# Altium PCB Apollo_ES_Board-V1.1 1.PcbDoc (part 2 of 3)
Units mil, origin at the board's own origin, x right, y up, seen from the top; angles counter-clockwise.
Board outline 984.25 x 614.17 mil, 4 copper layers (Top, Inner Layer 2, Inner Layer 3, Bottom), stack 4.71 mil thick; 86 components, 58 nets, 348 pads, 1209 vias.
Unrouted connection lines stored in the file: 448.
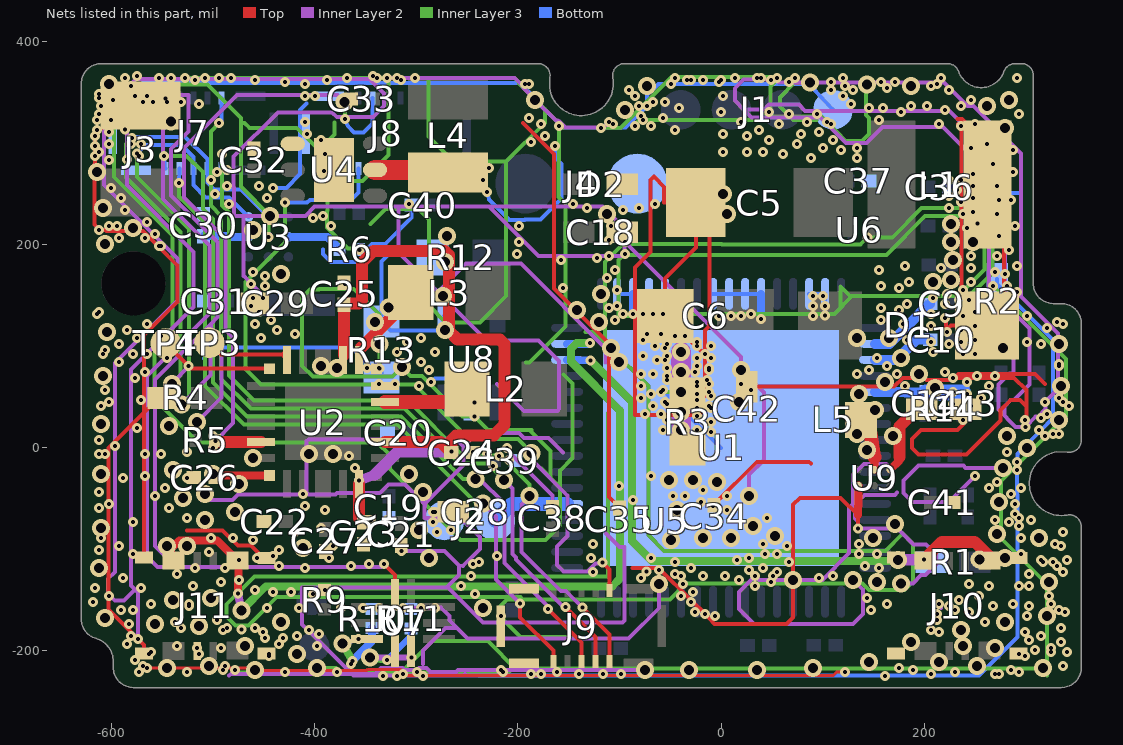
[diagram p4: the nets of this part, all layers, seen from the top]

## Via types
v1: diameter 9.84, hole 3.94, Top to Inner Layer 2, 528 vias
v2: diameter 9.84, hole 3.94, Inner Layer 3 to Bottom, 478 vias
v3: diameter 17.72, hole 9.84, Inner Layer 2 to Inner Layer 3, 198 vias
v4: diameter 17.72, hole 9.84, Top to Bottom, 5 vias

## Nets (pads, with @x,y where several pads share a name; then routed paths per layer and width w, separated by ;. In a path a pad name is that pad's centre, name@x,y a point inside that pad or via, vN(x,y) a via of type N, cw(c..) or ccw(c..) an arc to the next point about the centre after c; other vN are vias at no path point) (continued)
GND: C18.2 C19.1 C20.2 C21.1 C22.2 C23.2 C24.2 C25.1 C26.2 C27.2 C28.2 C29.1 C30.2 C31.2 C32.2 C33.2 C34.2 C35.1 C36.2 C37.1 C38.2 C39.2 C40.2 C41.2 C42.1 D2.2 J1.1 J2.1 J3.2 J4.2 J7.11 J7.12 J7.15 J8.11 J8.12 J8.15 J9.11 J9.12 J9.15 J10.0 J10.0/2 J10.0/3 J10.0/4 J11.0 J11.0/2 J11.0/3 J11.0/4 J11.3 R1.2 R2.2 R3.2 R4.2 R6.2 R9.1 R10.2 R11.2 R13.1 R14.1 U2.23 U2.24 U3.B2 U4.1 U4.7 U5.B1 U6.B1 U7.6 U8.2 U9.A1 | length 23287.8
  Top w2.95: v1(-564.96,-216.54) -463.92,-216.54 -461.46,-219 v1@-429.13,-219 ; v1(-429.13,-220.47) v1@-429.13,-219 ; v1(-377.95,-220.47) v1@-377.95,-219 ; v1(-293.31,-224.41) v1@-293.31,-224.08 ; v1(122.05,-220.47) 114.03,-220.47 110.43,-224.08 v1@-293.31,-224.08 ; v1@-429.13,-219 v1@-377.95,-219 ; v1@-377.95,-219 -348.81,-219 -347.82,-218.01 -315.42,-218.01 -309.35,-224.08 v1@-293.31,-224.08
  Top w3.94: J3.2@-571.52,336.63 -587.27,336.63 -616.79,307.11 v1(-616.14,297.24) v1(-616.14,287.4) -616.14,279.24 -616.79,278.59 -616.79,219.72 v1(-612.2,214.57) -606.18,214.57 -604.92,213.31 -569.12,213.31 v1@-553.89,198.08 ; J11.0/4@-568.01,-202.62 -568.01,-194.25 v1(-573.91,-188.35) -603.21,-159.05 -603.21,-0.15 -554.03,49.02 R4.2@-549.11,49.02 ; J11.0/3@-568.01,-108.05 -568.01,110.99 -535.35,143.65 -535.35,179.54 v1@-553.89,198.08 ; v1(-553.15,198.82) v1@-553.89,198.08 ; -525.74,-81.39 -490.61,-81.39 -475.78,-96.22 -462.58,-96.22 -450.49,-108.3 J11.0/2@-447.54,-108.3 ; -195.17,319.51 -164.72,289.06 -164.72,156.73 -110.52,102.54 -110.52,-48.27 C35.1@-100.28,-58.52 ; J9.12@-194.11,-212 -192.06,-212 J9.12@-190.7,-213.36 ; C38.2@-166.16,-58.48 v1(-166.16,-57.39) ; -87.36,-118.16 v1@-61.65,-118.16 ; v1(-61.02,-120.08) v1@-61.65,-118.16 ; v1(-29.53,-151.57) v1@-28.88,-150.93 ; C34.2@-6.96,-56.64 -6.96,-55.76 35.02,-13.78 86.64,-13.78 88.58,-15.73 ; C42.1@25.34,60.08 170.32,60.08 179.13,68.9 199.95,68.9 201.92,66.93 227.72,66.93 233.62,72.83 309.06,72.83 318.9,62.99 ; v1(134.56,-79.34) 134.56,-66.34 117.46,-49.24 77.42,-49.24 70.86,-55.8 70.86,-166.88 64.34,-173.38 -6.43,-173.38 v1(-15.75,-163.39) v1@-28.88,-150.93 ; v1(228.35,68.9) 288.24,68.76 300.33,56.67 300.33,40.75 ; R14.1@240.48,37.98 240.48,25.39 232.4,17.3 196.54,17.3 188.03,8.79 188.03,-0.17 194.38,-6.52 241.65,-6.52 275.14,26.97 275.14,37.22 285.02,47.1 ; 284.7,47.1 285.02,47.1 ; v1(299.46,20.61) v1@299.46,23.14 ; C35.1@-100.28,-58.52 v1(-98.43,-59.06) C35.1@-100.28,-59.39 C35.1@-100.28,-58.52 ; v1@-61.65,-118.16 v1@-28.88,-150.93 ; 285.02,47.1 293.98,47.1 300.33,40.75 ; 298.61,30.06 299.46,29.21 ; 298.61,30.06 300.33,30.08 ; 298.61,30.06 300.33,31.79 ; 298.61,30.06 295.57,27.03 v1@299.46,23.14 ; v1@299.46,23.14 299.46,29.21 ; 299.46,29.21 300.33,30.08 ; 300.33,30.08 300.33,31.79 ; 300.33,31.79 300.33,40.75
  Top w7.87: 134.56,-66.34 134.56,-57.85 134.92,-57.49 U9.A1@134.92,-37.29
  Inner Layer 2 w3.94: v1(-586.81,313.04) v1@-585.02,313.04 ; v1(-573.91,-188.35) -573.91,-142.7 -577.03,-139.58 ; v1(-568.9,340.55) v1@-568.62,340.27 ; -544.6,-109.33 -557.14,-96.79 -557.14,67.24 -502.33,122.05 ; v3(-515.75,25.59) -491.62,49.72 -491.62,107.35 -502.33,118.06 -502.33,122.05 ; v3(-507.87,-45.28) -511.59,-51.58 -481.08,-51.58 -475.57,-46.07 -405.9,-46.07 ; -484.25,-224.21 -482.48,-222.44 -340.55,-222.44 -334.65,-216.54 -313.81,-216.54 -311.84,-218.5 -299.23,-218.5 -297.27,-216.54 -289.84,-216.54 -285.9,-220.47 -260.86,-220.47 -258.89,-218.5 v3(-74.8,-218.5) ; v1(-450.79,147.64) -449.54,148.88 v1(-462.6,161.42) -469.92,169.26 -469.92,228.27 ; v1(-405.51,-179.13) v1@-406.29,-179.92 ; v1(-342.52,366.14) v1@-345.98,362.81 ; v1(-332.68,-224.41) v1@-332.68,-224.21 ; -332.59,-157.24 -276,-157.24 -267.51,-165.72 -267.51,-169.9 -259.84,-177.57 ; v1(-328.74,364.17) v1(-318.9,364.17) -262.65,364.17 -203.44,364.18 v1@-194.77,355.51 ; v1(-318.9,-224.41) v1@-318.9,-224.21 ; v1(-314.65,-101.75) -272.25,-101.75 -257.96,-116.04 ; v1(-293.31,-224.41) v1@-293.31,-224.21 ; -293.31,-212.6 -293.31,-199.57 -271.31,-177.57 -259.84,-177.57 ; -251.97,-222.44 -251.97,-224.21 ; -220.53,62.72 -194.22,36.41 -161.12,36.41 -159.45,38.08 -159.45,85.31 -179.83,105.69 -231.09,105.69 v3@-274.31,148.91 ; v1(-210.63,0) -211.82,-1.19 -166.16,-46.86 v1(-166.16,-57.39) ; -199.11,14.61 -240.15,14.61 -253.39,1.37 ; -199.1,14.61 -193.97,9.48 -169.79,9.48 -155.87,-4.44 ; v1(-192.91,358.27) v1@-194.77,355.51 ; v2(-187.01,-222.44) v1@-187.01,-224.21 ; v1(-177.17,-222.44) -176.73,-224.21 v1@-187.01,-224.21 ; v1(-122.05,187.01) v1@-122.05,188.56 ; -113.67,-83.73 -99.85,-97.55 -95.22,-97.55 -95.22,-169.89 -97.28,-171.94 -234.64,-171.94 -269.02,-137.56 -270.52,-137.56 ; -113.67,84.07 -113.67,97.77 -197.09,181.19 -251.13,181.19 v3@-278.86,153.46 ; v1(-110.24,320.87) -115.96,315.14 -153.28,315.14 -158.82,320.68 -159.03,320.68 -159.3,320.96 -159.46,320.96 -159.69,321.18 -159.87,321.18 -160.15,321.46 -160.48,321.46 -161.02,321.99 -162.55,321.99 v3(-183.07,342.52) -194.77,354.22 v1@-194.77,355.51 ; v1(-98.43,212.6) v1@-95.22,215.86 ; v3(-61.02,-133.86) -61.02,-157.96 -90.99,-187.93 -249.48,-187.93 -259.84,-177.57 ; v3(27.56,-47.24) 27.56,-26.32 41.96,-11.93 41.96,54.5 v3(19.69,76.77) 19.69,89.48 -34.52,143.68 -35.41,143.68 v1(-94.49,202.76) v1@-95.22,202.76 ; v1(35.43,364.17) v1@35.43,362.5 ; v1(66.93,360.24) v1@66.93,359.29 ; v1(108.27,360.24) v1@108.27,359.29 ; v3(129.92,-129.92) 139.75,-139.75 139.75,-163.46 129.98,-173.23 32.41,-173.23 17.72,-158.54 17.72,-141.73 31.5,-127.95 35.33,-127.95 37.3,-129.92 99.72,-129.92 125.98,-103.66 125.98,-59.06 129.92,-55.12 129.92,-26.37 140.54,-15.75 162.41,-15.75 163,-16.34 ; v3(143.37,357.42) v3@143.37,359.29 ; v1(157.48,360.24) v1@157.48,359.29 ; v1(171.26,360.24) v1@171.26,359.29 ; 173.29,-44.11 170.9,-46.5 141.31,-46.5 131.86,-55.95 131.86,-69.75 134.56,-72.45 v1(134.56,-79.34) 173.45,-79.34 189.28,-95.17 201.73,-95.17 208.07,-101.52 ; v3(177.16,-133.59) 188.67,-133.59 196.87,-125.39 200.96,-125.39 211.56,-114.79 ; v3(186.88,356.26) 186.88,358.52 v3@187.65,359.29 ; v1(224.41,352.36) v1@225.44,353.4 ; v1(250,-27.56) 224.31,-53.25 188.18,-53.25 179.53,-44.6 179.53,-32.36 194.25,-17.64 238.31,-17.64 240.35,-19.69 v3(277.56,-19.69) ; 278.67,31.79 278.67,40.75 285.02,47.1 288.24,47.1 303.62,62.48 303.62,117.28 279.26,141.64 279.26,277.31 224.93,331.64 82.55,331.63 76.4,337.78 47.18,337.78 42.36,332.96 22.07,332.96 ; v1(314.96,29.53) v1@312.17,30.77 ; v1@-585.02,313.04 -585.02,323.88 v1@-568.62,340.27 ; v1@-585.02,313.04 v1(-584.95,283.78) -585.02,258.46 -519.15,192.58 -519.15,138.64 -580.96,76.82 -580.96,-135.65 -577.03,-139.58 ; -577.03,-139.58 -587.82,-150.37 -596.86,-150.37 -603.35,-143.88 -603.35,-128.89 -596.77,-122.31 -596.77,83.28 -534.89,145.16 -534.89,186.06 -607.41,258.58 -607.41,331.42 -576.03,362.81 v1@-345.98,362.81 ; v1@-568.62,340.27 -561.85,347.05 -524.33,347.05 -524.33,311.35 -541.49,294.19 -541.49,248.33 -495.52,202.37 -495.52,128.85 -502.33,122.05 ; -469.92,228.27 -479.32,228.27 -479.77,286.46 -436.32,329.91 -382.88,329.91 -378.29,325.32 -342.71,325.32 -331.72,336.31 -331.72,348.55 v1@-345.98,362.81 ; -469.92,228.27 v3(-444.05,228.27) -409.13,228.27 -400.06,237.34 -317.44,237.34 ; v1@-406.29,-179.92 -412.41,-173.8 -412.41,-137.56 -270.52,-137.56 ; v1@-406.29,-179.92 -362,-224.21 v1@-332.68,-224.21 ; -405.9,-46.07 -379.84,-46.07 -378.34,-44.57 -335.94,-44.57 -327.39,-36.02 -311.12,-36.02 -291.78,-55.36 ; -405.9,-46.07 -408,-43.97 -408,6.49 -406.19,8.3 -260.32,8.3 -253.39,1.37 ; v1@-332.68,-224.21 v1@-318.9,-224.21 ; v1@-318.9,-224.21 v1@-293.31,-224.21 ; -317.44,237.34 -317.44,192.04 v3@-278.86,153.46 ; -317.44,237.34 -228.48,237.34 ; v1@-293.31,-224.21 -251.97,-224.21 ; -291.78,-57.09 -291.34,-57.09 -291.78,-55.36 ; -291.78,-57.09 -291.78,-55.36 ; -291.78,-57.09 -291.78,-69.17 -256.44,-69.17 -237.6,-88.01 -237.6,-99.43 -253.94,-116.14 -257.96,-116.04 ; -291.78,-55.36 -253.39,-16.97 -253.39,1.37 ; v3@-278.86,153.46 v3(-273.62,149.61) v3@-274.31,148.91 ; v3@-278.86,153.46 v3@-274.31,148.91 ; -270.52,-137.56 -257.96,-125 -257.96,-116.04 ; -251.97,-224.21 v1@-187.01,-224.21 ; -228.48,237.34 -179.7,188.56 v1@-122.05,188.56 ; -228.48,237.34 v3@-116.71,237.34 ; v1@-122.05,188.56 v1(-110.24,188.98) v1@-97.75,188.56 ; v3@-116.71,237.34 v3@-110.94,231.58 ; v3@-116.71,237.34 v3(-112.2,230.31) v3@-110.94,231.58 ; v3@-110.94,231.58 v1@-95.22,215.86 ; v1@-97.75,188.56 v1@-95.22,191.09 ; v1@-97.75,188.56 v1(-94.49,190.94) v1@-95.22,191.09 ; v1@-95.22,191.09 v1@-95.22,202.76 ; v1@-95.22,202.76 v1@-95.22,215.86 ; 22.07,332.96 30,325.03 97.68,325.03 122.65,300.06 143.12,300.06 158.93,315.87 218.42,315.87 263.51,270.79 263.51,135.12 287.87,110.75 287.87,73.18 283.7,73.18 272.93,62.41 272.93,37.53 289.85,20.61 v1(299.46,20.61) 309.62,30.77 v1@312.17,30.77 ; 22.07,332.96 13.42,341.61 13.42,353.85 22.07,362.5 v1@35.43,362.5 ; v1@35.43,362.5 v1(49.21,362.2) 53.77,362.5 56.98,359.29 v1@66.93,359.29 ; v1@66.93,359.29 v3(87.28,359.29) v1@108.27,359.29 ; v1@108.27,359.29 v3@143.37,359.29 ; v3@143.37,359.29 v1@157.48,359.29 ; v1@157.48,359.29 v1@171.26,359.29 ; v1@171.26,359.29 v3@187.65,359.29 ; v3@187.65,359.29 219.55,359.29 v1@225.44,353.4 ; 208.07,-101.52 211.89,-105.34 211.89,-114.46 211.56,-114.79 ; 208.07,-101.52 211.56,-105.01 211.56,-114.79 ; v1@225.44,353.4 242.6,336.24 248.24,336.24 295,289.48 295,148.88 331.38,112.51 331.38,57.76 v1(318.9,45.28) 319.37,37.97 v1@312.17,30.77 ; v1(214.57,-153.54) 216.45,-153.54 216.45,-157.49 v1(214.57,-153.54)
  Inner Layer 3 w3.94: v2(-517.72,362.2) v2@-517.72,364.18 ; -473.37,-221.32 -374.46,-221.32 ; v2(-445.57,207.51) -445.57,226.75 v3(-444.05,228.27) -472.71,256.93 -472.71,319.54 ; v3(-397.64,-216.54) -379.24,-216.54 -374.46,-221.32 ; v2(-389.76,289.37) v2@-393.48,290.44 ; -380.76,320.35 -380.76,308.41 -393.48,295.69 v2@-393.48,290.44 ; -365.13,262.49 -353.1,262.49 -327.6,287.99 -327.6,362.85 -326.27,364.18 ; v2(-355.84,194.44) v2@-355.84,196.09 ; -345.31,220.2 -330.47,235.04 -298.09,235.04 -287.6,224.55 -287.6,193.77 ; v3(-340.55,124.02) v3@-336.5,131.1 ; v2(-336.5,77.95) v3(-336.5,102.12) v3@-336.5,131.1 ; v3(-271.65,116.14) v3@-271.16,123.52 ; v2(-265.75,-80.71) v2@-266.03,-81 ; -192.05,84 -188.7,84 -153.43,119.26 -153.43,240.29 -160.11,246.97 v2(-159.45,316.93) ; -186.44,17.46 -188.55,17.46 ; v2(-177.17,318.9) v2@-173.63,319.79 ; -176.93,-20.55 -167.87,-29.61 ; -155.04,72.15 -146.36,63.47 -146.36,-10.11 -158.86,-22.61 -158.86,-38.62 ; -148.27,-186.4 -197.43,-186.4 -217.82,-166.01 -217.82,-156.23 -210.89,-149.3 -195.25,-149.3 ; -133.73,113.77 -124.77,113.77 -116.02,105.03 ; v2@-114.17,-218.5 -114.17,-217.23 ; -111.3,34.25 -111.3,-126.5 -459.23,-126.5 -486.76,-154.03 -486.76,-166.27 -478.11,-174.92 -465.41,-174.92 -437.62,-147.13 -197.42,-147.13 -195.25,-149.3 ; v3(-108.27,98.43) v3@-108.85,97.85 ; v2(-84.65,316.93) -85.29,317.58 v2@-80.24,322.63 ; v2(-78.74,326.77) v2@-80.24,322.63 ; v2(-45.28,364.17) v2@-45.28,364.78 ; v3(-31.5,-218.5) v3@-31.5,-217.23 ; v2(13.78,364.17) v2@13.78,364.78 ; v3(35.43,-218.5) v3@35.43,-217.23 ; v2(39.37,364.17) v2@39.37,364.78 ; v3(87.28,359.29) 72.2,359.29 57.76,344.85 57.76,335.89 71.02,322.63 93.82,322.63 ; v3(90.55,-216.54) v3@90.55,-217.23 ; v3(143.37,357.42) 142.37,356.42 142.37,327.41 145.3,324.48 145.3,308.71 138.59,302 122.61,302 113.94,310.68 110.53,314.37 v2(104.33,320.87) 98.74,326.16 42.47,326.16 ; v3(177.16,-133.59) v3@180.49,-140.12 ; 239.69,144.85 v2@266.92,172.09 ; v2(267.72,159.45) 339.53,87.45 v3@339.53,31.32 ; v2(269.69,173.23) v2@266.92,172.09 ; v3(271.65,-84.65) v3@275.26,-89.07 ; v2(271.65,-33.46) v2@275.26,-32.95 ; v3(273.62,-53.15) v3@275.26,-53.15 ; v2(285.43,-218.5) v2@285.43,-217.23 ; v3(320.87,-165.35) v3@320.52,-165.35 ; v3(322.83,-131.89) v3@320.52,-134.33 ; v3(332.68,27.56) v3@339.53,31.32 ; -529,357.38 -522.2,364.18 v2@-517.72,364.18 ; -529,357.38 -570,357.38 -597.41,329.97 -597.41,266.62 -539.81,209.03 -539.81,110.72 -557.52,93.01 -557.52,47.92 -515,5.4 -338.58,5.4 -325.97,-7.21 -325.97,-21.06 v2(-283.46,-62.99) v2@-266.03,-81 ; -529,357.38 -505.51,357.38 -472.71,324.57 -472.71,319.54 ; v2@-517.72,364.18 v2(-507.87,364.17) v2(-494.09,364.17) v2(-482.28,364.17) v2(-368.11,364.17) v2(-338.58,364.17) -326.27,364.18 ; -472.71,319.54 -469.01,319.54 -464.44,314.97 -418.01,314.97 v2@-393.48,290.44 ; v2@-393.48,290.44 -387.29,284.25 -387.29,233.39 -387.98,232.7 -387.98,216.68 -367.39,196.09 v2@-355.84,196.09 ; -374.46,-221.32 v2@-315.15,-221.32 ; v2@-355.84,196.09 -289.92,196.09 -287.6,193.77 ; v3@-336.5,131.1 -361.9,156.5 -395.15,156.5 -396.05,155.6 -404.75,155.6 -412.4,147.95 -412.4,80.61 -401.91,70.13 -323.54,70.13 v3(-314.37,79.3) -305.93,70.86 -294.47,70.86 -254.45,30.84 v2(-242.91,30.84) -229.53,17.46 -188.55,17.46 ; -326.27,364.18 v2(-301.18,364.17) -288,364.18 ; v2@-315.15,-221.32 -284.25,-190.42 -229.37,-190.42 -201.29,-218.5 v3(-74.8,-218.5) v3@-74.8,-217.23 ; v2@-315.15,-221.32 -209.55,-221.32 -205.46,-217.23 -114.17,-217.23 ; -288,364.18 -288,306.39 -263.41,281.8 -211.62,281.8 ; -288,364.18 -203.44,364.18 -198.81,359.55 -198.81,358.38 v3(-183.07,342.52) -173.63,333.2 ; -287.6,193.77 -287.6,139.96 v3@-271.16,123.52 ; v3@-271.16,123.52 -237.41,123.52 -211.62,149.31 -211.62,281.8 ; v2@-266.03,-81 -256.39,-90.64 -172.76,-90.64 -158.86,-76.74 -158.86,-38.62 ; -211.62,281.8 v2@-173.63,319.79 ; -195.25,-149.3 -50.55,-149.31 -34.98,-133.74 139.2,-133.74 145.58,-140.12 v3@180.49,-140.12 ; -188.55,17.46 -167.87,-3.22 -167.87,-29.61 ; v2@-173.63,319.79 -173.63,333.2 ; -173.63,333.2 v2@-160.11,319.68 ; -167.87,-29.61 -158.86,-38.62 ; v2@-160.11,319.68 v2(-159.45,316.93) ; v2@-160.11,319.68 v2@-155.58,315.15 ; v2(-159.45,316.93) v2@-155.58,315.15 ; v2@-155.58,315.15 v2(-118.11,314.96) -98.57,315.15 -48.94,364.78 v2@-45.28,364.78 ; -116.02,105.03 -114.41,106.64 -114.41,182.82 -96.79,200.44 -8.1,200.44 ; -116.02,105.03 v3@-108.85,97.85 ; -114.17,-217.23 v3@-74.8,-217.23 ; v3@-108.85,97.85 -71.66,60.66 -71.66,-86.09 -56.17,-101.58 161.74,-101.57 178.71,-84.6 188.97,-94.86 188.97,-131.64 v3@180.49,-140.12 ; v2@-80.24,322.63 38.94,322.63 42.47,326.16 ; v3@-74.8,-217.23 v3@-31.5,-217.23 ; v2@-45.28,364.78 v2@13.78,364.78 ; v3@-31.5,-217.23 v3@35.43,-217.23 ; -8.1,200.44 0.32,200.44 0.83,199.93 ; -8.1,200.44 0.83,199.93 ; 0.83,199.93 136.89,199.93 v2(143.93,206.97) 168.49,206.97 197.34,235.82 259.24,235.82 266.92,228.13 v2@266.92,172.09 ; v2@13.78,364.78 v2@39.37,364.78 ; v3@35.43,-217.23 v3@90.55,-217.23 ; v2@39.37,364.78 v2@55.12,364.78 ; 42.47,326.16 48.47,332.16 48.47,355.46 v2@57.79,364.78 ; v2@55.12,364.78 v2(55.12,364.17) v2@57.79,364.78 ; v2@55.12,364.78 v2@57.79,364.78 ; v3@90.55,-217.23 v2@285.43,-217.23 ; v3@275.26,-89.07 v3@320.52,-134.33 ; v3@275.26,-89.07 v3@275.26,-53.15 ; v3@275.26,-53.15 v2@275.26,-32.95 ; v2@275.26,-32.95 v3@339.53,31.32 ; v2@285.43,-217.23 v3@313.54,-217.23 ; v3@313.54,-217.23 v3(316.93,-216.54) v3@320.52,-216.54 ; v3@313.54,-217.23 320.52,-224.21 v3@320.52,-216.54 ; v3@320.52,-216.54 v3@320.52,-165.35 ; v3@320.52,-165.35 v3@320.52,-134.33
  Bottom w3.94: v2(-576.77,346.46) J7.12@-576.05,346.14 -576.05,352.83 -569.62,359.26 v2@-429.13,359.26 ; -509.18,87.93 -498.29,98.82 -363.94,98.82 R13.1@-334.19,69.07 -334.19,75.64 v2(-336.5,77.95) ; v2(-440.94,255.91) -427.84,255.91 -414.38,269.37 -414.38,332.46 -408.11,338.73 ; v2(-429.13,360.24) v2@-429.13,359.26 ; v2(-409.45,358.27) v2@-409.45,359.26 ; -391.81,195.36 -391.81,190.7 -384.1,182.99 -354.48,182.99 -352.36,185.11 ; v2(-355.84,194.44) R6.2@-356.68,195.28 ; -352.36,145.82 -352.36,185.11 ; C40.2@-304.63,238.94 -304.63,226.62 -330.46,200.79 -343.81,200.79 -348.17,196.43 ; -284.3,65.52 -281.82,68 -259.7,68 -245.92,54.21 U8.2@-245.92,44.37 ; v2(-242.91,30.84) -242.91,41.37 U8.2@-245.92,44.37 ; v2(-242.56,44.79) U8.2@-245.92,44.37 ; -238.26,-224.21 253.7,-224.21 291.49,-186.42 v2@291.49,-76.77 ; v2(-230.31,251.97) -230.98,251.72 -228.35,244.61 -228.35,244.2 -208.56,224.41 -193.37,224.41 -193.22,224.56 -178.03,224.56 -157.28,245.32 -157.28,279.46 -163.39,285.57 v2(-163.39,297.24) ; v2(-159.45,316.93) v2@-158.4,317.97 ; J1.1@110.13,332.7 91.01,353.21 86.1,358.12 -61.69,358.12 -72.83,346.98 v2(-72.83,336.61) -94.39,315.15 v2(-118.11,314.96) -155.58,315.15 v2@-158.4,317.97 ; C36.2@225.23,256.51 238.53,256.89 254.92,256.89 260.83,250.98 292.89,250.98 ; R2.2@271.71,166.27 271.71,161.35 v2@302.16,130.9 ; v2(293.31,-76.77) v2@291.49,-76.77 ; v2(301.18,129.92) v2@302.16,130.9 ; v2(312.99,17.72) v2@314.06,16.65 ; v2@-429.13,359.26 v2@-409.45,359.26 ; v2@-409.45,359.26 -198.33,359.26 -183.24,344.17 -183.24,342.81 v2@-158.4,317.97 ; R6.2@-356.68,195.28 -348.74,195.28 ; R6.2@-356.68,195.28 R6.2@-352.36,192.24 ; -352.36,185.11 R6.2@-352.36,192.24 ; R6.2@-352.36,192.24 -349.03,195.57 ; -349.03,195.57 -348.17,196.43 ; -349.03,195.57 -348.17,195.85 ; -349.03,195.57 -348.74,195.28 ; -348.74,195.28 -348.17,196.43 ; -348.74,195.28 -348.17,195.85 ; -348.17,195.85 -348.17,196.43 ; v2@291.49,-76.77 v2(291.34,-13.78) 291.49,-5.92 v2@314.06,16.65 ; v2@302.16,130.9 326.77,106.29 326.77,29.36 v2@314.06,16.65 ; R11.2@-305.37,-158.77 -305.37,-158.14 -304.33,-158.14 R11.2@-305.37,-158.77
  other v1: 161.42,-224.41 -187.01,-222.44 206.69,-222.44 273.62,-222.44 -572.83,-220.47 -525.59,-220.47 -214.57,-220.47 230.31,-220.47 293.31,-220.47 -490.16,-218.5 -478.35,-218.5 188.98,-218.5 175.2,-216.54 336.61,-214.57 -364.17,-212.6 -576.77,-208.66 -562.99,-202.76 -444.88,-202.76 293.31,-202.76 340.55,-200.79 309.06,-198.82 -515.75,-196.85 324.8,-196.85 -397.64,-194.88 -584.65,-192.91 -435.04,-192.91 -417.32,-185.04 314.96,-185.04 -395.67,-183.07 -450.79,-181.1 214.57,-181.1 299.21,-181.1 -472,-178.86 206.69,-179.13 -486.22,-177.17 334.65,-177.17 -582.68,-173.23 -537.4,-171.26 259.84,-171.26 -496.06,-169.29 212.6,-169.29 -216.54,-165.35 -5.91,-165.35 -25.59,-161.42 244.09,-161.42 -590.55,-159.45 -578.74,-159.45 147.64,-159.45 230.31,-159.45 332.68,-159.45 -446.85,-157.48 -415.35,-157.48 -523.62,-155.51 267.72,-155.51 303.15,-155.51 -561.02,-153.54 163.39,-153.54 287.4,-153.54 -618.11,-151.57 234.25,-149.61 143.7,-147.64 -39.37,-145.67 253.94,-145.67 322.83,-145.67 -401.57,-143.7 -242.13,-143.7 -440.94,-141.73 -423.23,-141.73 -27.56,-141.73 -458.66,-139.76 -389.76,-139.76 -616.14,-137.8 -255.91,-135.83 33.46,-135.83 263.78,-135.83 293.31,-135.83 -37.4,-133.86 244.09,-133.86 49.21,-131.89 17.72,-129.92 -246.06,-125.98 -45.28,-124.02 303.15,-124.02 -73.52,-121.95 55.12,-122.05 27.56,-120.08 -29.53,-118.11 41.34,-118.11 155.51,-118.11 141.73,-116.14 330.71,-116.14 -244.09,-114.17 -45.28,-112.2 66.93,-112.2 316.93,-112.2 15.75,-110.24 -68.9,-108.27 27.56,-108.27 -440.94,-106.3 43.31,-104.33 55.12,-104.33 135.83,-104.33 153.54,-104.33 -612.2,-100.39 64.96,-96.46 41.34,-94.49 135.83,-94.49 328.74,-94.49 -610.24,-88.58 295.28,-88.58 283.46,-72.83 269.69,-70.87 45.28,-68.9 293.31,-68.9 -281.5,-62.99 5.91,-61.02 -612.2,-59.06 -7.87,-57.09 289.37,-55.12 -19.69,-53.15 -86.61,-51.18 -47.24,-47.24 -35.43,-47.24 5.91,-47.24 -612.2,-43.31 -17.72,-41.34 263.78,-39.37 295.28,-39.37 -100.39,-37.4 -68.9,-27.56 291.34,-21.65 -224.41,-17.72 -208.66,-11.81 -218.5,-7.87 -612.2,-5.91 -230.31,-5.91 -244.09,-3.94 281.5,-3.94 -612.2,7.87 318.9,11.81 332.68,13.78 238.19,27.56 -610.24,41.34 246.06,41.34 342.52,41.34 228.35,43.31 255.91,49.21 332.68,49.21 242.13,53.15 228.35,55.12 -606.3,57.09 29.53,57.09 -297.24,61.02 181.1,61.02 263.78,61.02 -336.61,62.99 -320.87,62.99 19.69,62.99 -285.43,64.96 242.13,64.96 251.97,70.87 269.69,70.87 133.86,72.83 173.23,72.83 220.47,74.8 -287.4,76.77 145.67,76.77 -336.61,78.74 163.39,80.71 332.68,80.71 -295.28,84.65 153.54,88.58 -608.27,92.52 -318.9,94.49 -281.5,94.49 -592.52,102.36 -309.06,104.33 183.07,106.3 -452.76,108.27 -295.28,108.27 -419.29,112.2 -584.65,116.14 -437.01,116.14 -458.66,122.05 179.13,122.05 330.71,124.02 -442.91,125.98 -104.33,125.98 157.48,125.98 -612.2,133.86 -454.72,133.86 175.2,135.83 -110.24,137.8 157.48,137.8 -462.6,139.76 -102.36,139.76 183.07,141.73 -460.63,147.64 -102.36,155.51 -155.51,157.48 175.2,157.48 -448.82,159.45 157.48,159.45 -370.08,161.42 185.04,163.39 -112.2,167.32 -448.82,169.29 -460.63,173.23 -104.33,175.2 155.51,175.2 181.1,179.13 -157.48,185.04 -110.24,204.72 -592.52,206.69 -566.93,206.69 -594.49,218.5 -383.86,218.5 -108.27,218.5 -401.57,226.38 -391.73,228.35 -484.25,240.16 -498.03,250 -486.22,257.87 -501.97,263.78 -496.06,271.65 -486.22,273.62 88.58,285.43 133.86,285.43 -572.83,287.4 61.02,289.37 1.97,291.34 25.59,291.34 41.34,291.34 118.11,293.31 100.39,295.28 133.86,295.28 -580.71,299.21 -570.87,299.21 74.8,299.21 47.24,303.15 110.24,303.15 25.59,307.09 1.97,309.06 78.74,309.06 96.46,311.02 -614.17,312.99 -45.28,312.99 37.4,312.99 57.09,318.9 108.27,318.9 19.69,320.87 84.65,320.87 -76.77,322.83 -57.09,324.8 -612.2,328.74 66.93,328.74 293.31,328.74 0,330.71 47.24,330.71 -41.34,334.65 -80.71,336.61 -513.78,338.58 -559.06,340.55 -545.28,340.55 -531.5,340.55 -66.93,340.55 -55.12,340.55 246.06,342.52 -612.2,344.49 1.97,346.46 -90.55,352.36 122.05,356.3 206.69,356.3 -49.21,358.27 -33.46,362.2 0,362.2 216.54,364.17 291.34,364.17
  other v2: -312.99,-222.44 -139.76,-222.44 -116.14,-222.44 -98.43,-222.44 269.69,-222.44 -299.21,-220.47 -161.42,-220.47 -216.54,-218.5 -568.9,-214.57 -488.19,-214.57 -444.88,-204.72 299.21,-204.72 -513.78,-202.76 -561.02,-200.79 324.8,-200.79 -492.13,-196.85 -535.43,-194.88 334.65,-190.94 303.15,-188.98 -448.82,-187.01 -431.1,-187.01 -580.71,-185.04 -490.16,-179.13 -531.5,-177.17 -458.66,-177.17 301.18,-165.35 212.6,-163.39 338.58,-161.42 -578.74,-159.45 -374.02,-157.48 -352.36,-157.48 -336.61,-157.48 -312.99,-157.48 -295.28,-157.48 -281.5,-157.48 224.41,-155.51 -523.62,-153.54 324.8,-153.54 -602.36,-145.67 -570.87,-137.8 -519.68,-135.83 303.15,-135.83 -492.13,-131.89 -474.41,-129.92 -588.58,-127.95 -78.74,-127.95 96.46,-127.95 -39.37,-125.98 -17.72,-125.98 3.94,-125.98 33.46,-125.98 51.18,-125.98 110.24,-125.98 -535.43,-124.02 -125.98,-122.05 336.61,-122.05 -517.72,-118.11 -488.19,-118.11 -409.45,-118.11 -435.04,-116.14 -364.17,-116.14 -346.46,-114.17 -238.19,-112.2 326.77,-112.2 -474.41,-110.24 314.96,-110.24 340.55,-110.24 -456.69,-108.27 -385.83,-108.27 -127.95,-108.27 -220.47,-106.3 -578.74,-104.33 295.28,-104.33 -503.94,-102.36 -435.04,-100.39 -592.52,-96.46 -381.89,-96.46 334.65,-96.46 -125.98,-94.49 -460.63,-90.55 -501.97,-88.58 -480.31,-88.58 -419.29,-82.68 -279.53,-82.68 336.61,-82.68 -393.7,-78.74 -578.74,-72.83 -283.46,-72.83 -344.49,-70.87 -328.74,-70.87 305.12,-70.87 -525.59,-68.9 289.37,-64.96 -389.76,-61.02 -543.31,-59.06 -409.45,-57.09 -602.36,-55.12 -557.09,-47.24 -411.42,-45.28 285.43,-45.28 -547.24,-39.37 -588.58,-29.53 -525.59,-29.53 -566.93,-27.56 -360.24,-19.69 -366.14,-7.87 -606.3,-5.91 -566.93,-5.91 -551.18,-5.91 -525.59,-3.94 -500,0 -596.46,1.97 -500,11.81 326.77,13.78 -574.8,19.69 299.21,27.56 320.87,33.46 -602.36,45.28 336.61,45.28 -570.87,47.24 -576.77,68.9 -566.93,74.8 -348.43,78.74 332.68,82.68 -592.52,84.65 -545.28,88.58 -578.74,92.52 -564.96,92.52 -606.3,96.46 314.96,102.36 301.18,104.33 -574.8,108.27 -551.18,110.24 320.87,118.11 -564.96,122.05 336.61,122.05 -614.17,131.89 291.34,153.54 281.5,159.45 279.53,171.26 291.34,179.13 271.65,188.98 -200.79,190.94 283.46,194.88 -551.18,198.82 -198.82,202.76 273.62,208.66 -557.09,210.63 -602.36,218.5 -198.82,218.5 289.37,218.5 -564.96,222.44 271.65,230.31 -586.61,234.25 -96.46,234.25 -131.89,236.22 -80.71,236.22 -307.09,240.16 -145.67,240.16 -64.96,240.16 273.62,244.09 285.43,244.09 -590.55,246.06 -446.85,246.06 244.09,250 -600.39,255.91 -454.72,257.87 271.65,257.87 -234.25,263.78 248.03,269.69 -390.84,272.28 287.4,271.65 -228.35,275.59 267.72,279.53 -602.36,283.46 -612.2,291.34 287.4,293.31 246.06,295.28 -602.36,299.21 261.81,299.21 -187.01,301.18 -393.7,303.15 -616.14,307.09 -173.23,307.09 -407.48,309.06 -602.36,311.02 -68.9,316.93 236.22,316.93 -106.3,318.9 214.57,318.9 250,318.9 -409.45,320.87 -614.17,322.83 -600.39,322.83 155.51,322.83 -188.98,324.8 94.49,328.74 177.17,330.71 220.47,332.68 145.67,334.65 159.45,334.65 -610.24,336.61 187.01,336.61 202.76,336.61 236.22,336.61 127.95,338.58 -598.43,342.52 -564.96,346.46 -409.45,346.46 -399.61,346.46 -84.65,346.46 120.08,346.46 -612.2,348.43 108.27,352.36 129.92,352.36 163.39,354.33 -580.71,356.3 -188.98,358.27 212.6,358.27 -1.97,360.24 -458.66,362.2 -387.8,362.2 -314.96,362.2 -29.53,362.2 -17.72,362.2 -586.61,364.17 -553.15,364.17 -541.34,364.17 -527.56,364.17 72.83,364.17 120.08,364.17 -574.8,366.14
  other v3: -458.66,-218.5 -545.28,-216.54 -503.94,-214.57 251.97,-214.57 145.67,-210.63 214.57,-210.63 -417.32,-202.76 269.69,-196.85 -468.5,-194.88 238.19,-194.88 187.01,-190.94 236.22,-179.13 -513.78,-175.2 -557.09,-173.23 -433.07,-171.26 279.53,-171.26 -606.3,-167.32 -234.25,-157.48 -539.37,-149.61 -501.97,-147.64 153.54,-131.89 70.87,-129.92 -612.2,-118.11 254.47,-110.18 -287.4,-108.27 279.53,-108.27 -411.42,-98.43 -545.28,-96.46 -525.59,-96.46 -49.21,-90.55 -17.72,-88.58 9.84,-88.58 149.61,-88.58 312.99,-88.58 53.15,-86.61 -297.24,-80.71 -610.24,-78.74 31.5,-76.77 171.26,-74.8 -507.87,-70.87 -478.35,-62.99 -43.31,-61.02 -529.53,-49.21 -293.31,-43.31 -474.41,-35.43 -3.94,-33.46 -51.18,-31.5 -27.56,-31.5 -610.24,-25.59 -500,-25.59 -307.09,-25.59 -539.37,-21.65 -460.63,-9.84 -405.51,-5.91 -381.89,-5.91 143.7,-1.97 301.18,0 169.29,11.81 281.5,11.81 133.86,13.78 -543.31,21.65 -610.24,23.62 151.57,37.4 17.72,45.28 135.83,53.15 210.63,59.06 334.65,61.02 161.42,64.96 -608.27,70.87 194.88,72.83 -377.95,78.74 -393.7,80.71 -100.39,84.65 177.17,88.58 277.56,98.43 332.68,102.36 133.86,108.27 165.35,108.27 -604.33,114.17 -120.08,124.02 -141.73,135.83 -327.28,138.08 -118.11,151.57 -433.07,171.26 -271.65,183.07 -606.3,200.79 -269.69,208.66 -460.63,214.57 -578.74,216.54 5.91,230.31 -608.27,236.22 1.97,250 -614.17,271.65 279.53,314.96 -94.49,332.68 261.81,336.61 283.46,342.52 -72.83,356.3 -602.36,358.27
HVSS: C5.2 C6.2 R3.1 U1.65 | length 1013.1
  Top w3.94: v1(-74.8,33.46) v1@-74.8,32.49 ; v1(-59.06,33.46) v1@-59.06,32.49 ; v1(-55.12,98.43) C6.2@-55.13,129.82 ; -18.89,35.08 -21.48,32.49 v1@-59.06,32.49 ; v1(-11.81,55.12) -15.83,51.1 v1@-15.83,91.71 ; v1@-74.8,32.49 v1@-59.06,32.49 ; v1@-74.8,32.49 -84.94,32.49 -84.94,177.37 -69.69,192.62 -69.69,263.36 -66.25,266.8 -56.18,256.73 -56.18,241.37 C5.2@-24.98,241.37 ; C6.2@-55.13,129.82 -55.13,166.8 -24.98,196.95 C5.2@-24.98,241.37 ; C6.2@-55.13,129.82 -53.94,129.82 v1(-35.43,110.24) v1@-15.83,91.71 ; C5.2@-24.98,241.37 -22.85,241.37 C5.2@-11.25,229.77 ; C5.2@-24.98,241.37 C5.2@-11.25,229.77 ; v1@-15.83,91.71 v1(-15.75,92.52) -15.83,115.56 -11.25,120.14 C5.2@-11.25,229.77
  Inner Layer 2 w3.94: v3(-39.37,55.12) v1@-23.62,55.12 ; v1(-23.62,53.15) v1@-23.62,55.12 ; v1(-11.81,55.12) v1@-23.62,55.12
  Inner Layer 2 w19.68: v3(-39.37,17.72) v3(-39.37,35.43) v3(-39.37,55.12) v3(-39.37,74.8) v3(-39.37,94.49)
  Inner Layer 3 w3.94: v2(-59.06,55.12) v3(-39.37,55.12)
  Bottom w3.94: v2(-59.06,55.12) -55.12,55.12 U1.65@0,0
  other v1: -23.62,39.37 -66.93,41.34 -11.81,41.34 -55.12,45.28 -78.74,49.21 -68.9,53.15 -57.09,57.09 -78.74,61.02 -23.62,64.96 -13.78,66.93 -53.15,70.87 -78.74,72.83 -66.93,72.83 -11.81,78.74 -23.62,80.71 -62.99,86.61 -55.12,86.61 -76.77,90.55 -64.96,100.39 -23.62,104.33 -76.77,106.3 -45.28,110.24 -72.83,112.2 -59.06,112.2
  other v2: -9.84,15.75 -57.09,17.72 -23.62,17.72 -9.84,25.59 -53.15,27.56 -23.62,31.5 -9.84,39.37 -53.15,43.31 -23.62,47.24 -9.84,51.18 -23.62,61.02 -11.81,62.99 -53.15,66.93 -25.59,74.8 -11.81,76.77 -53.15,78.74 -23.62,88.58 -9.84,88.58 -53.15,90.55 -23.62,100.39 -9.84,100.39 -53.15,102.36
I2C1_SCL: J7.6 J9.5 | length 792.3
  Top w3.94: v1(-136.39,-157.4) -110.06,-183.73 J9.5@-110.06,-210.33
  Inner Layer 2 w3.94: v3(-188.48,-47.69) -196.49,-55.7 -196.49,-102.41 -157.68,-141.22 -152.57,-141.22 v1(-136.39,-157.4)
  Inner Layer 3 w3.94: v2(-491.46,289.13) -491.46,238.67 -484.18,231.39 -484.18,115.84 -484.43,115.59 -484.43,71.18 -459.65,46.4 -308.38,46.4 -254.61,-7.37 -217.31,-7.37 -188.48,-36.2 v3(-188.48,-47.69)
  Bottom w3.94: J7.6@-492,274.63 v2(-491.46,289.13)
I2C1_SDA: J7.5 J9.4 | length 821.8
  Top w3.94: v1(-153.12,-156.88) -123.84,-186.16 J9.4@-123.84,-210.33
  Inner Layer 2 w3.94: v3(-213.61,-31.95) -205.62,-39.94 -205.62,-104.42 -202.07,-107.97 -202.07,-109.95 -180.82,-131.2 ; -180.78,-131.2 -155.1,-156.88 v1(-153.12,-156.88)
  Inner Layer 3 w3.94: v2(-494.18,319.6) -502.29,311.49 -502.29,238.32 -492.31,228.33 -492.31,67.91 -462.92,38.52 -311.87,38.52 -257.64,-15.71 -229.85,-15.71 v3(-213.61,-31.95)
  Bottom w3.94: v2(-494.18,319.6) -492,321.78 J7.5@-492,344.47
I2C3_SCL: J7.10 J9.3 | length 792
  Top w3.94: v1(-170.46,-158.77) -137.62,-191.61 J9.3@-137.62,-210.33
  Inner Layer 2 w3.94: v3(-241.98,-30.64) -237.76,-30.64 -213.49,-54.91 -213.49,-113.4 -170.46,-156.43 v1(-170.46,-158.77)
  Inner Layer 3 w3.94: v2(-548.24,287.09) -526.05,287.09 -510.24,271.28 -510.24,235.13 -500.18,225.07 -500.18,64.32 -466.5,30.64 -315.21,30.64 -253.93,-30.64 v3(-241.98,-30.64)
  Bottom w3.94: v2(-548.24,287.09) -548.1,279.06 -548.1,274.63 J7.10@-547.11,274.63
I2C3_SDA: J7.9 J9.1 | length 730
  Top w3.94: v1(-197.88,-153.16) -197.88,-166.9 -165.18,-199.6 J9.1@-165.18,-210.33
  Inner Layer 2 w3.94: v3(-234.43,-54.85) -221.44,-67.84 -221.44,-129.6 v1(-197.88,-153.16)
  Inner Layer 3 w3.94: v2(-533.45,260.69) -533.45,247.21 -508.07,221.83 -508.07,60.96 -469.87,22.76 -318.59,22.76 -240.98,-54.85 v3(-234.43,-54.85)
  Bottom w3.94: v2(-533.45,260.69) J7.9@-533.33,274.63
I2C5_SCL: J7.8 TP3.1 U2.5 U3.A3 | length 602.8
  Top w3.94: v1(-502.45,101.54) -502.2,101.79 TP3.1@-503.66,103.26 -492.26,91.86 -431.66,91.86 ; -431.66,91.86 -427.35,96.17 U2.5@-427.35,86.33 -431.66,91.86
  Inner Layer 2 w3.94: v3(-531.4,42.68) -502.45,71.63 v1(-502.45,101.54)
  Inner Layer 3 w3.94: v2(-574.89,289.78) -574.89,266.37 -524.01,215.49 -524.01,50.07 v3(-531.4,42.68)
  Bottom w3.94: v2(-574.89,289.78) -566.75,297.92 -531.12,297.92 -519.55,286.35 J7.8@-519.55,274.63 -519.55,258.43 -507.48,246.36 -484.46,246.36 U3.A3@-465.29,227.19
I2C5_SDA: J7.7 TP4.1 U2.6 U3.A2 | length 587.3
  Top w3.94: TP4.1@-546.69,102.74 v1(-524.17,80.46) -521.81,78.1 U2.6@-444.48,77.86
  Inner Layer 2 w3.94: v3(-540.49,62.8) v1(-524.17,80.46)
  Inner Layer 3 w3.94: v2(-579.87,304.97) -585.72,299.12 -585.72,266.07 -531.94,212.29 -531.94,71.35 v3(-540.49,62.8)
  Bottom w3.94: v2(-579.87,304.97) -579.04,305.8 -527.57,305.8 -505.78,284.01 J7.7@-505.78,274.63 -505.78,261.18 -499,254.4 -472.82,254.4 U3.A2@-445.61,227.19
ICM_INT1: J8.10 J9.6 | length 805.7
  Top w3.94: v1(-116.9,-113.17) -110.06,-120.01 J9.6@-110.06,-140.49
  Inner Layer 2 w3.94: v3(-186.68,-5.29) -186.68,-11.71 -151.16,-47.23 -151.16,-87 -161.43,-97.26 -161.43,-115.2 -155.08,-121.55 -131.6,-121.55 -123.75,-113.7 -116.9,-113.7 v1(-116.9,-113.17)
  Inner Layer 3 w3.94: v2(-429.27,241.51) -429.27,202.22 -468.28,163.21 -468.28,77.66 -452.82,62.2 -301.59,62.2 -248.01,8.62 -200.2,8.62 -186.68,-4.9 v3(-186.68,-5.29)
  Bottom w3.94: v2(-429.27,241.51) -407.43,241.51 -404.91,244.03 -364.32,244.03 -357.11,251.24 J8.10@-357.11,274.63
NETC9_1: C9.1 U1.50 | length 70.5
  Bottom w9.84: U1.50@151.57,102.36 165.73,102.36 184.39,121.02 204.86,141.73 C9.1@205.74,141.73
NETC10_1: C10.1 U1.51 | length 62.3
  Bottom w9.84: U1.51@151.57,86.61 172.45,86.61 192.16,106.32 C10.1@205.74,106.3
NETC13_2: C13.2 C14.1 U1.53 | length 86.8
  Bottom w9.84: U1.53@151.57,55.12 180.89,55.12 181.59,54.42 C14.1@201.54,54.42
  Bottom w15.75: C14.1@201.54,54.42 219.77,54.42 C13.2@238.07,54.48
NETC23_1: C23.1 C24.1 C25.2 U2.2 U2.17 U2.20 | length 711.2
  Top w3.94: U2.2@-372.24,86.33 U2.2@-372.24,91.11 ; U2.17@-356.49,-35.72 v1(-356.49,-32.24)
  Top w7.87: U2.2@-372.24,86.33 U2.2@-371.02,91.11
  Top w9.38: U2.2@-372.24,91.11 U2.2@-371.02,91.11
  Top w9.84: C24.1@-265.61,-4.83 v1(-265.2,-3.52)
  Top w11.81: U2.2@-371.02,91.11 C25.2@-371.02,139.97 ; U2.17@-356.49,-35.72 -356.49,-68.91 C23.1@-351.98,-73.42 ; U2.20@-330.9,5.62 -310.21,5.62 -276.06,5.62 C24.1@-265.61,-4.83 ; v1(-265.2,-3.52) -265.61,7.45 -260.86,12.2 -223.7,12.2 -213.24,22.66 -213.24,102.02 -217.76,106.54 -259.52,106.54 -267.98,115 -267.98,189.51 -271.95,193.48 -342.31,193.48 -353.71,182.08 -353.71,145.17 -356.75,142.13 C25.2@-371.02,142.13 ; C25.2@-371.02,139.97 C25.2@-371.02,140.85 C25.2@-371.02,142.13 ; C25.2@-371.02,139.97 C25.2@-371.02,142.13
  Inner Layer 2 w9.84: v1(-356.49,-32.24) -340.74,-26.56
  Inner Layer 2 w11.81: -340.74,-26.56 -317.7,-3.52 v1(-265.2,-3.52)
NETC26_1: C26.1 U2.12 | length 53.9
  Top w7.87: C26.1@-497.53,-29.33 -495.45,-27.25 U2.12@-444.48,-27.25
NETC30_1: C30.1 U3.B3 | length 44.5
  Bottom w7.87: C30.1@-509.45,208.22 -509.42,208.26 -486.94,208.26 -486.19,207.51 U3.B3@-465.29,207.51
NETL2_1: L2.1 U2.22 | length 86.7
  Top w13.78: U2.22@-330.9,44.99 -271.19,44.99 -250.24,53.67 L2.1@-250.24,58.03
NETL3_1: L3.1 U2.1 | length 106.7
  Top w3.94: U2.1@-356.49,86.33 U2.1@-356.49,96.38
  Top w5.77: U2.1@-356.49,96.38 U2.1@-354.35,98.52
  Top w7.87: U2.1@-356.49,86.33 U2.1@-354.35,98.52
  Top w11.81: U2.1@-354.35,98.52 -317.22,135.65 -305.61,135.65 L3.1@-305.61,152.75
NETL4_2: L4.2 U4.5 | length 74.3
  Top w19.68: U4.5@-340.7,273.57 -268.93,273.57 L4.2@-268.93,271.07
NETL5_2: L5.2 U9.B2 | length 58.2
  Top w7.87: U9.B2@150.67,-21.54 150.67,-8.91
  Top w13.78: L5.2@137.78,27.52 146.64,27.52 146.64,16.69 150.67,-8.91
NETR6_1: R6.1 U3.B1 | length 55.5
  Bottom w7.87: U3.B1@-425.92,207.51 -387.51,207.51 -375.7,195.69 R6.1@-375.7,195.28
NETR10_1: R10.1 U7.5 | length 84.5
  Top w3.94: v1(-356.84,-188.2) U7.5@-348.53,-188.2
  Inner Layer 2 w4.72: v3(-372.54,-192.79) v1(-356.84,-188.2)
  Inner Layer 3 w7.87: v3(-372.54,-192.79) v2(-363.07,-209.83)
  Bottom w7.87: v2(-363.07,-209.83) -343.46,-190.22 R10.1@-343.46,-177.57
NETR11_1: R11.1 U7.7 | length 105
  Top w3.94: U7.7@-305.23,-200.02 -304.97,-200.28 v1(-304.97,-206.55)
  Inner Layer 2 w5.91: v3(-345.63,-206.55) v1(-304.97,-206.55)
  Inner Layer 3 w7.87: v3(-345.63,-206.55) v2(-328.71,-208.76)
  Bottom w5.91: v2(-328.71,-208.76) -305.37,-185.42 R11.1@-305.37,-177.79
NETR12_1: R12.1 R13.2 U8.4 | length 266.3
  Bottom w3.94: R13.2@-334.19,124.18 -334.19,183.45 -324.22,193.42 -284.02,193.42 R12.1@-284.02,187.28 -277.23,187.28 -271.51,181.55 U8.4@-271.51,130.99 -272.58,129.92 -272.58,115.51 -325.52,115.51 R13.2@-334.19,124.18
NETR14_2: R14.2 U9.C2 | length 75.3
  Top w7.87: U9.C2@166.42,-21.54 175.4,-12.56 175.4,-9.29
  Top w11.81: 175.4,-9.29 175.4,20.74 192.64,37.98 R14.2@197.56,37.98
NRST: J2.2 U1.21 | length 77.7
  Bottom w13.78: J2.2@-222.38,-71.69 -205.81,-55.12 U1.21@-151.57,-55.12
PMIC_INT: J8.2 R5.1 U2.10 | length 625.3
  Top w11.81: U2.10@-452.94,5.62 R5.1@-496.73,5.62 ; R5.1@-496.73,5.62 v1(-497.85,6.74) R5.1@-498.37,7.27 R5.1@-496.73,5.62
  Inner Layer 2 w3.94: v1(-497.85,6.74) -480.31,24.28 -480.31,108.51 -487.64,115.83 -487.64,205.62 -528.49,246.47 -528.49,294.92 -476.43,346.98 -377.87,346.98 v3(-370.98,340.09)
  Inner Layer 3 w3.94: v3(-370.98,340.09) v2(-370.43,323.6)
  Bottom w3.94: v2(-370.43,323.6) -367.53,316.77 -361.24,310.48 -352.24,310.48 -343.33,319.38 J8.2@-343.33,344.47
RX: J7.1 U7.2 | length 775
  Top w3.94: v1(-332.03,-114.4) -320.97,-125.46 U7.2@-320.97,-144.9
  Inner Layer 2 w3.94: v3(-541.5,321.3) -549.36,313.44 -549.36,245.07 -503.4,199.1 -503.4,132.12 -565.01,70.5 -565.01,-106.9 -554.7,-117.21 -334.84,-117.21 v1(-332.03,-114.4)
  Inner Layer 3 w3.94: v2(-546.96,343.9) -541.5,338.44 v3(-541.5,321.3)
  Bottom w3.94: J7.1@-547.11,344.47 v2(-546.96,343.9)
STIMULATE+: J10.5 J10.6 U1.30 | length 600
  Top w9.84: v1(199.75,-109.9) J10.5@201.05,-111.2
  Top w11.81: J10.5@201.05,-111.2 201.05,-108.92 200.74,-108.92 217.14,-92.52 249.46,-92.52 265,-108.06 264.04,-108.06 J10.6@264.04,-110.99
  Inner Layer 2 w11.81: v3(174.21,-110.69) v1(199.75,-109.9)
  Inner Layer 3 w7.87: v2(-128.59,86.11) -87.68,45.2 -87.68,-91.8 -68.06,-111.42 174.21,-111.42 v3(174.21,-110.69)
  Bottom w7.87: U1.30@-151.57,86.61 -139.76,86.61 -129.52,86.11 v2(-128.59,86.11)
STIMULATE-: J11.5 J11.6 U1.31 | length 816.1
  Top w7.87: J11.5@-539.27,-111.2 -541.28,-111.2 -541.28,-99.47 -533.05,-91.24 -496.03,-91.24 J11.6@-476.28,-110.99 -475.23,-110.99 v1(-475.39,-143.47)
  Inner Layer 2 w7.87: v1(-475.39,-143.47) v3(-472,-160.15)
  Inner Layer 3 w7.87: v3(-472,-160.15) -448.2,-136.35 -107.11,-136.35 -99.51,-128.75 -99.51,36.49 -147.86,84.84 -147.86,97.55 -142.47,102.94 v2(-129.25,102.94)
  Bottom w7.87: U1.31@-151.57,102.36 -129.83,102.36 v2(-129.25,102.94)
SW: D1.2 L1.2 U1.34 U1.35 U1.36 U1.37 U1.40 U1.41 U1.42 U1.43 U1.46 U1.47 | length 1886.2
  Top w3.94: v1(222.44,114.17) v1@221.05,115.54 ; 232.49,323.4 237.12,323.4 L1.2@262.14,298.39 ; v1(234.25,145.67) D1.2@236.64,145.79 ; v1(236.22,242.13) v1@236.64,242.13 ; v1(236.22,263.78) v1@236.64,263.78 ; v1(238.19,155.51) v1@236.64,155.51 ; v1(238.19,230.31) v1@236.64,230.31 ; v1(250,120.08) D1.2@250,120.53 ; v1(250,133.86) D1.2@249.15,133.01 ; v1(252.25,220.68) 262.14,220.68 L1.2@262.14,259.02 ; v1@221.05,115.54 v1@221.05,127.95 ; v1@221.05,115.54 226.04,120.53 D1.2@250,120.53 ; v1@221.05,127.95 v1(220.47,127.95) 221.05,130.11 v1@221.05,127.95 ; D1.2@236.64,145.79 233.96,143.11 D1.2@239.05,143.11 ; D1.2@236.64,145.79 D1.2@261.63,120.53 ; D1.2@236.64,145.79 v1@236.64,155.51 ; v1@236.64,155.51 v1@236.64,230.31 ; v1@236.64,230.31 v1@236.64,242.13 ; v1@236.64,242.13 v1@236.64,263.78 ; v1@236.64,263.78 236.64,315.13 233.21,318.56 L1.2@262.14,318.56 ; D1.2@239.05,143.11 D1.2@249.15,133.01 ; D1.2@239.05,143.11 D1.2@261.63,120.53 ; D1.2@249.15,133.01 D1.2@261.63,120.53 ; D1.2@250,120.53 D1.2@261.63,120.53 ; D1.2@261.63,120.53 278.16,120.53 278.16,242.99 L1.2@262.14,259.02 ; L1.2@262.14,259.02 L1.2@262.14,298.39 ; L1.2@262.14,259.02 L1.2@262.14,318.56 ; L1.2@262.14,298.39 L1.2@262.14,318.56
  Inner Layer 2 w3.94: v3(248.05,202.64) 247.38,202.64 247.38,215.81 v1(252.25,220.68)
  Inner Layer 3 w3.94: v2(-96.46,131.89) v2@-100.39,129.78 ; v2(-1.97,129.92) v2@-1.97,131.83 ; v2(9.84,129.92) v2@9.84,131.83 ; v2(19.69,129.92) v2@19.69,131.83 ; v2(39.37,126.88) 39.22,126.88 39.22,131.83 ; v2(90.55,129.92) v2@90.55,131.83 ; 117.29,137.75 117.29,158.84 126.96,149.17 128.71,149.17 ; v3(248.05,202.64) 248.05,202.2 259.05,202.2 ; v2@-100.39,129.78 -88.66,129.78 v2(-86.61,131.83) v2(-76.77,131.89) v2(-66.93,131.89) v2(-57.09,131.89) v2@-1.97,131.83 ; v2@-100.39,129.78 -101.24,130.63 -101.24,184.85 -96.21,189.88 162.54,189.88 200.6,227.94 255.98,227.94 259.05,224.87 259.05,202.2 ; v2@-1.97,131.83 v2@9.84,131.83 ; v2@9.84,131.83 v2@19.69,131.83 ; v2@19.69,131.83 v2(29.53,131.89) 39.22,131.83 ; 39.22,131.83 v2@90.55,131.83 ; v2@90.55,131.83 v2@101.88,131.83 ; v2@101.88,131.83 111.37,131.83 128.71,149.17 ; v2@101.88,131.83 v2(102.36,130) 102.36,131.35 v2@101.88,131.83 ; 128.71,149.17 232.87,149.17 259.05,175.35 259.05,202.2
  Bottom w3.94: U1.34@-102.36,151.57 U1.35@-86.61,151.57 U1.36@-70.87,151.57 U1.37@-55.12,151.57 ; U1.40@-7.87,151.57 U1.41@7.87,151.57 U1.42@23.62,151.57 U1.43@39.37,151.57 ; v2(90.55,149.61) U1.46@86.61,151.57 U1.47@102.36,151.57 ; v2(100.39,149.61) U1.47@102.36,151.57 ; v2(102.36,130) v2(102.36,139.76) U1.47@102.36,151.57
  Bottom w7.87: v2(-86.61,131.83) U1.35@-86.61,151.57 ; v2(39.37,126.88) U1.43@39.37,151.57
  other v1: 238.19,92.52 250,92.52 208.66,94.49 224.41,102.36 206.69,104.33 236.22,104.33 250,106.3 236.22,116.14 206.69,120.08 238.19,129.92 206.69,131.89 220.47,141.73 244.09,145.67 208.66,147.64 222.44,151.57 246.06,163.39 216.54,177.17 246.06,177.17 246.06,188.98 242.13,216.54 248.03,232.28 224.41,236.22 248.03,246.06 224.41,248.03 232.28,253.94 248.03,257.87 224.41,263.78
  other v2: 90.55,139.76
  other v3: 208.66,163.39 226.38,165.35 228.35,185.04 226.38,202.76 226.38,220.47